# Altium PCB PCB.PcbDoc
Units mm, origin at the board's own origin, x right, y up, seen from the top; angles counter-clockwise.
Board outline 161.87 x 80 mm, 2 copper layers (Top Layer, Bottom Layer), stack 1.531 mm thick; 104 components, 44 nets, 267 pads, 77 vias.
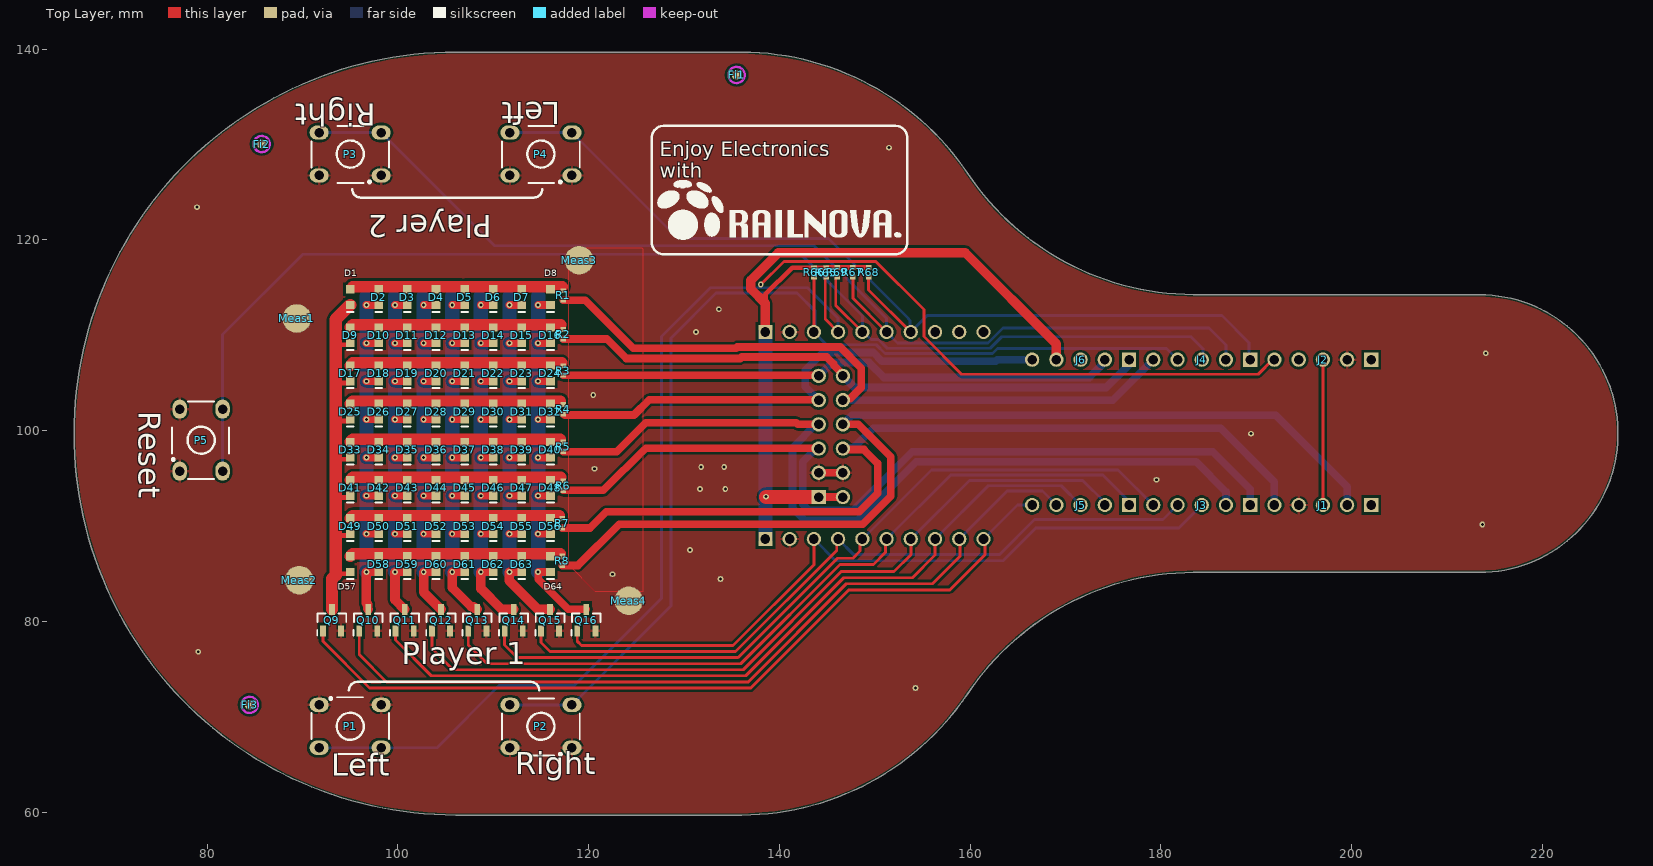
[diagram p0: Top Layer view]
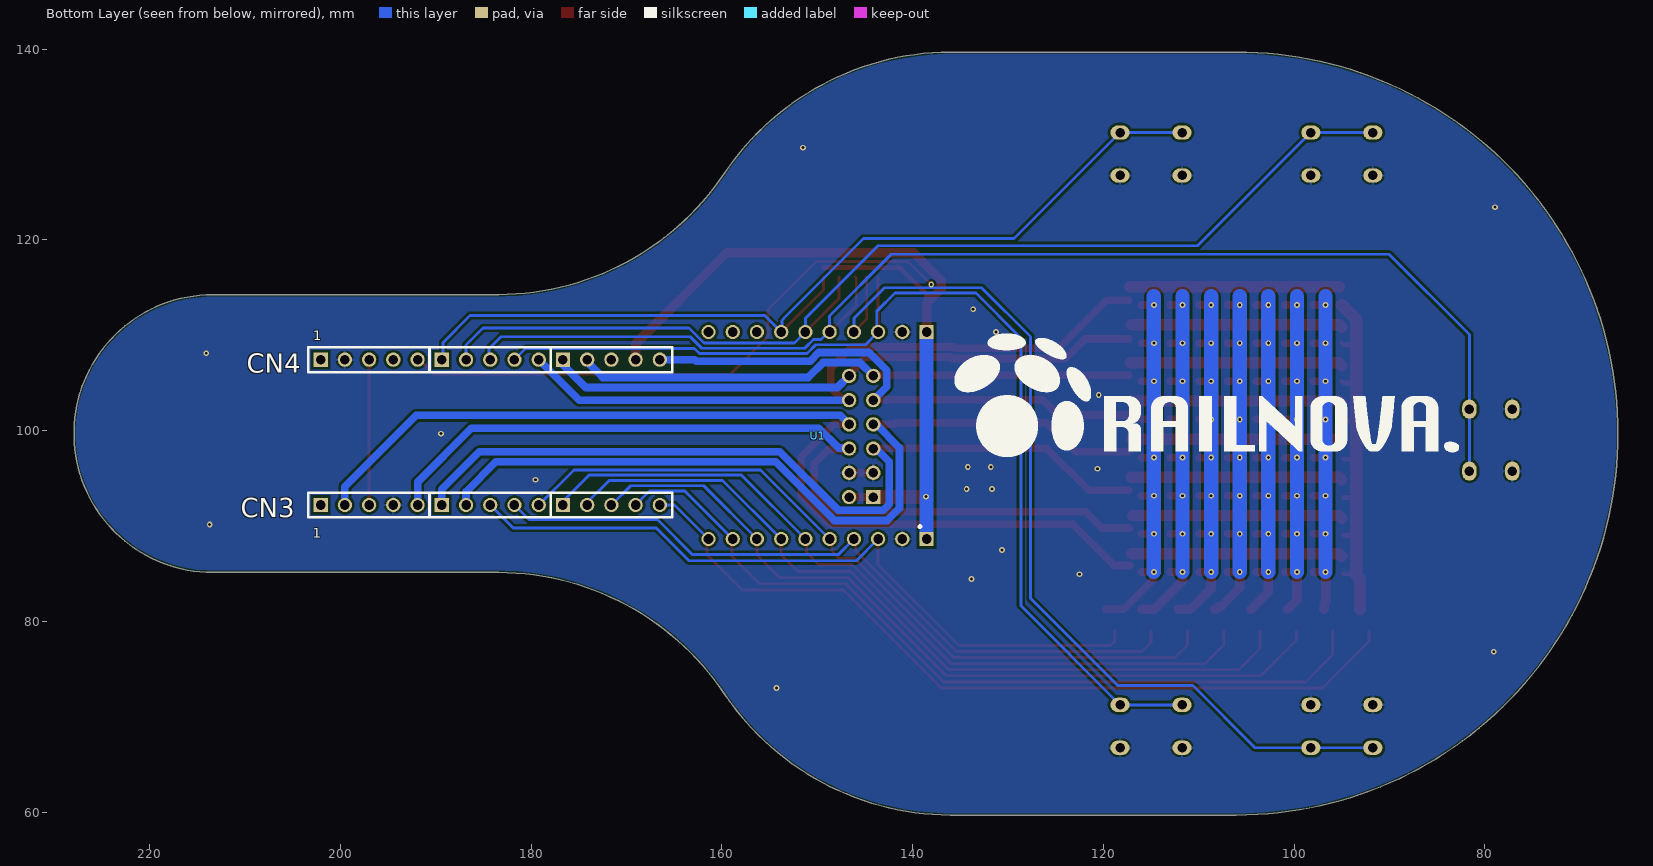
[diagram p1: Bottom Layer view, seen from below]

## Layer stack, top to bottom
Top Solder: solder mask 0.0102, Solder Resist, Dk 3.5
Top Layer: signal copper 0.0356
Dielectric 1: dielectric 1.46, FR-4, Dk 4.8
Bottom Layer: signal copper 0.0356
Bottom Solder: solder mask 0.0102, Solder Resist, Dk 3.5

## Board outline
106.045,59.695 cw(c106.045,99.695) 106.045,139.695 136.045,139.695 cw(c135.89,110.998) 159.729,126.975 ccw(c183.567,142.952) 183.412,114.255 213.412,114.255 cw(c213.36,99.695) 213.412,85.135 183.412,85.135 ccw(c183.567,56.438) 159.729,72.415 cw(c135.89,88.392) 136.045,59.695

## Design rules (kind name [scope] priority, off if disabled: settings)
BoardOutlineClearance [All] p1: gap=0.2 ignorepadtopadclearanceinfootprint=FALSE
Clearance [All] p1: gap=0.254 ignorepadtopadclearanceinfootprint=FALSE except(0: Arc-Hole Track-Hole SMDPad-Hole THPad-Hole Via-Hole Fill-Hole Poly-Hole Region-Hole Text-Hole)
PolygonConnect PolygonConnectDirectOverride [HasFootprint('FOX_measure_point_3mm')] p1: connectstyle=Direct reliefconductorwidth=0.254 reliefentries=4 polygonreliefangle="90 Angle" airgapwidth=0.254
PolygonConnect "PolygonConnect GND" [InNet('GND')] p2: thpad.connectstyle=Relief thpad.reliefconductorwidth=0.3 thpad.reliefentries=4 thpad.polygonreliefangle="90 Angle" thpad.airgapwidth=0.2 smdpad.connectstyle=Relief smdpad.reliefconductorwidth=0.3 smdpad.reliefentries=4 smdpad.polygonreliefangle="90 Angle" smdpad.airgapwidth=0.175 via.connectstyle=Direct via.reliefconductorwidth=0.2 via.reliefentries=4 via.polygonreliefangle="90 Angle" via.airgapwidth=0.2
PolygonConnect Default [All] p3: connectstyle=Direct reliefconductorwidth=0.254 reliefentries=4 polygonreliefangle="90 Angle" airgapwidth=0.254
RoutingVias [All] p1: holewidth=0.711 width=1.27 viastyle="Through Hole" minholewidth=0.3 minwidth=0.6 maxholewidth=0.711 maxwidth=1.27
SolderMaskExpansion [All] p1: expansion=0.102 istentingtop=FALSE
Width [All] p1: maxlimit=10 minlimit=0.254 preferedwidth=0.254 minimp=50.000000 maximp=50.000000 favimp=50.000000
30 further rules are at their usual default settings.

## Classes and differential pairs
component class "Top level": Fi1 Fi2 Fi3 J1 J2 J3 J4 J5 J6 Meas1 Meas2 Meas3 Meas4 P1 P2 P3 P4 P5 R65 R66 R67 R68 R69 U1
component class "U_LED Array": D1 D2 D3 D4 D5 D6 D7 D8 D9 D10 D11 D12 D13 D14 D15 D16 D17 D18 D19 D20 D21 D22 D23 D24 D25 D26 D27 D28 D29 D30 D31 D32 D33 D34 D35 D36 D37 D38 D39 D40 D41 D42 D43 D44 D45 D46 D47 D48 D49 D50 D51 D52 D53 D54 D55 D56 D57 D58 D59 D60 D61 D62 D63 D64 Q9 Q10 Q11 Q12 Q13 Q14 Q15 Q16 R1 R2 R3 R4 R5 R6 R7 R8

## Components (designator, comment, footprint, x,y, rotation, side; value= is the part's Value field where it differs from the comment)
D1 "RED" LED0603-IPC-MD 95,114 r90 top locked
D2 "RED" LED0603-IPC-MD 98,114 r90 top locked
D3 "RED" LED0603-IPC-MD 101,114 r90 top locked
D4 "RED" LED0603-IPC-MD 104,114 r90 top locked
D5 "RED" LED0603-IPC-MD 107,114 r90 top locked
D6 "RED" LED0603-IPC-MD 110,114 r90 top locked
D7 "RED" LED0603-IPC-MD 113,114 r90 top locked
D8 "RED" LED0603-IPC-MD 116,114 r90 top locked
D9 "RED" LED0603-IPC-MD 95,110 r90 top locked
D10 "RED" LED0603-IPC-MD 98,110 r90 top locked
D11 "RED" LED0603-IPC-MD 101,110 r90 top locked
D12 "RED" LED0603-IPC-MD 104,110 r90 top locked
D13 "RED" LED0603-IPC-MD 107,110 r90 top locked
D14 "RED" LED0603-IPC-MD 110,110 r90 top locked
D15 "RED" LED0603-IPC-MD 113,110 r90 top locked
D16 "RED" LED0603-IPC-MD 116,110 r90 top locked
D17 "RED" LED0603-IPC-MD 95,106 r90 top locked
D18 "RED" LED0603-IPC-MD 98,106 r90 top locked
D19 "RED" LED0603-IPC-MD 101,106 r90 top locked
D20 "RED" LED0603-IPC-MD 104,106 r90 top locked
D21 "RED" LED0603-IPC-MD 107,106 r90 top locked
D22 "RED" LED0603-IPC-MD 110,106 r90 top locked
D23 "RED" LED0603-IPC-MD 113,106 r90 top locked
D24 "RED" LED0603-IPC-MD 116,106 r90 top locked
D25 "RED" LED0603-IPC-MD 95,102 r90 top locked
D26 "RED" LED0603-IPC-MD 98,102 r90 top locked
D27 "RED" LED0603-IPC-MD 101,102 r90 top locked
D28 "RED" LED0603-IPC-MD 104,102 r90 top locked
D29 "RED" LED0603-IPC-MD 107,102 r90 top locked
D30 "RED" LED0603-IPC-MD 110,102 r90 top locked
D31 "RED" LED0603-IPC-MD 113,102 r90 top locked
D32 "RED" LED0603-IPC-MD 116,102 r90 top locked
D33 "RED" LED0603-IPC-MD 95,98 r90 top locked
D34 "RED" LED0603-IPC-MD 98,98 r90 top locked
D35 "RED" LED0603-IPC-MD 101,98 r90 top locked
D36 "RED" LED0603-IPC-MD 104,98 r90 top locked
D37 "RED" LED0603-IPC-MD 107,98 r90 top locked
D38 "RED" LED0603-IPC-MD 110,98 r90 top locked
D39 "RED" LED0603-IPC-MD 113,98 r90 top locked
D40 "RED" LED0603-IPC-MD 116,98 r90 top locked
D41 "RED" LED0603-IPC-MD 95,94 r90 top locked
D42 "RED" LED0603-IPC-MD 98,94 r90 top locked
D43 "RED" LED0603-IPC-MD 101,94 r90 top locked
D44 "RED" LED0603-IPC-MD 104,94 r90 top locked
D45 "RED" LED0603-IPC-MD 107,94 r90 top locked
D46 "RED" LED0603-IPC-MD 110,94 r90 top locked
D47 "RED" LED0603-IPC-MD 113,94 r90 top locked
D48 "RED" LED0603-IPC-MD 116,94 r90 top locked
D49 "RED" LED0603-IPC-MD 95,90 r90 top locked
D50 "RED" LED0603-IPC-MD 98,90 r90 top locked
D51 "RED" LED0603-IPC-MD 101,90 r90 top locked
D52 "RED" LED0603-IPC-MD 104,90 r90 top locked
D53 "RED" LED0603-IPC-MD 107,90 r90 top locked
D54 "RED" LED0603-IPC-MD 110,90 r90 top locked
D55 "RED" LED0603-IPC-MD 113,90 r90 top locked
D56 "RED" LED0603-IPC-MD 116,90 r90 top locked
D57 "RED" LED0603-IPC-MD 95,86 r90 top locked
D58 "RED" LED0603-IPC-MD 98,86 r90 top locked
D59 "RED" LED0603-IPC-MD 101,86 r90 top locked
D60 "RED" LED0603-IPC-MD 104,86 r90 top locked
D61 "RED" LED0603-IPC-MD 107,86 r90 top locked
D62 "RED" LED0603-IPC-MD 110,86 r90 top locked
D63 "RED" LED0603-IPC-MD 113,86 r90 top locked
D64 "RED" LED0603-IPC-MD 116,86 r90 top locked
Fi1 "700-0003" Fiducial_1mm 135.509,137.287 r0 top
Fi2 "700-0003" Fiducial_1mm 85.725,130.048 r0 top
Fi3 "700-0003" Fiducial_1mm 84.455,71.247 r0 top
J1 "M20-9990545" CON-HDR-VER-M1X5 196.977,92.202 r180 top
J2 "M20-9990545" CON-HDR-VER-M1X5 196.977,107.442 r180 top
J3 "M20-9990545" CON-HDR-VER-M1X5 184.277,92.202 r180 top
J4 "M20-9990545" CON-HDR-VER-M1X5 184.277,107.442 r180 top
J5 "M20-9990545" CON-HDR-VER-M1X5 171.577,92.202 r180 top
J6 "M20-9990545" CON-HDR-VER-M1X5 171.577,107.442 r180 top
Meas1 "700-0012" FOX_measure_point_3mm 89.408,111.76 r0 top
Meas2 "700-0012" FOX_measure_point_3mm 89.662,84.328 r0 top
Meas3 "700-0012" FOX_measure_point_3mm 118.999,117.856 r0 top
Meas4 "700-0012" FOX_measure_point_3mm 124.206,82.169 r0 top
P1 "TS01-66-73-BK-100-D" TS01-66-70-BK 95,69 r0 top
P2 "TS01-66-73-BK-100-D" TS01-66-70-BK 115,69 r180 top
P3 "TS01-66-73-BK-100-D" TS01-66-70-BK 95,129 r180 top
P4 "TS01-66-73-BK-100-D" TS01-66-70-BK 115,129 r180 top
P5 "TS01-66-73-BK-100-D" TS01-66-70-BK 79.375,99 r90 top
Q9 "PMV37ENEA" SOT-23 93.091,80.137 r90 top value="60V 3.5A"
Q10 "PMV37ENEA" SOT-23 96.901,80.137 r90 top value="60V 3.5A"
Q11 "PMV37ENEA" SOT-23 100.711,80.137 r90 top value="60V 3.5A"
Q12 "PMV37ENEA" SOT-23 104.521,80.137 r90 top value="60V 3.5A"
Q13 "PMV37ENEA" SOT-23 108.331,80.137 r90 top value="60V 3.5A"
Q14 "PMV37ENEA" SOT-23 112.141,80.137 r90 top value="60V 3.5A"
Q15 "PMV37ENEA" SOT-23 115.951,80.137 r90 top value="60V 3.5A"
Q16 "PMV37ENEA" SOT-23 119.761,80.137 r90 top value="60V 3.5A"
R1 "470" R0402-IPC-MD 117.348,114.173 r270 top
R2 "470" R0402-IPC-MD 117.348,110.109 r270 top
R3 "470" R0402-IPC-MD 117.348,106.299 r270 top
R4 "470" R0402-IPC-MD 117.348,102.235 r270 top
R5 "470" R0402-IPC-MD 117.348,98.298 r270 top
R6 "470" R0402-IPC-MD 117.348,94.234 r270 top
R7 "470" R0402-IPC-MD 117.242,90.294 r270 top
R8 "470" R0402-IPC-MD 117.221,86.36 r270 top
R65 "10k" R0402-IPC-MD 144.907,116.578 r90 top
R66 "10k" R0402-IPC-MD 143.637,116.586 r90 top
R67 "10k" R0402-IPC-MD 147.701,116.594 r90 top
R68 "10k" R0402-IPC-MD 149.352,116.594 r90 top
R69 "10k" R0402-IPC-MD 146.05,116.594 r90 top
U1 "ICE40HX1K-STICK-EVN" ICE-stick 145.435,99.538 r0 bottom locked

## Footprints (in the part's own frame and the unit in brackets; to place one, negate y for a bottom-side part, rotate by r counter-clockwise, add the part's x,y. Pads: shape width x height; smd on the part's side, far side on the other; paste and mask are expansions set on the pad)
CON-HDR-VER-M1X5 [mm] "Connector; Header; 5x1 Position; vertical Rev=A"
  rect 1.5x1.5 hole 1: 1(-5.08,0)
  round 1.5 hole 1: 2(-2.54,0) 3(0,0) 4(2.54,0) 5(5.08,0)
  body extent -6.35,-1.27 6.35,1.27, height 8.64
Fiducial_1mm [mm] "Fiducial, 1mm dot Rev=A"
  round 1 smd paste-0.5 mask+0.5: pad(0,0)
  Top Layer keep-out circle w0.254: c0,0 r0.85
FOX_measure_point_3mm [mm] "FOX measuring point 3mm Rev=A"
  round 3 smd: pad(0,0)
ICE-stick [mm] "ICE40 USB stick Module Rev=A"
  rect 1.5x1.5 hole 1: 1(-6.9,-10.8) 11(-6.9,10.9) 21(-1.32,6.5)
  round 1.5 hole 1: 2(-4.36,-10.8) 3(-1.82,-10.8) 4(0.72,-10.8) 5(3.26,-10.8) 6(5.8,-10.8) 7(8.34,-10.8) 8(10.88,-10.8) 9(13.42,-10.8) 10(15.96,-10.8) 12(-4.36,10.9) 13(-1.82,10.9) 14(0.72,10.9) 15(3.26,10.9) 16(5.8,10.9) 17(8.34,10.9) 18(10.88,10.9) 19(13.42,10.9) 20(15.96,10.9) 22(-1.32,3.96) 23(-1.32,1.42) 24(-1.32,-1.12) 25(-1.32,-3.66) 26(-1.32,-6.2) 27(1.22,6.5) 28(1.22,3.96) 29(1.22,1.42) 30(1.22,-1.12) 31(1.22,-3.66) 32(1.22,-6.2)
  silkscreen extent -6.25,9.55 -6.15,9.65, body extent -8.43,-12.52 95.57,12.48, height 4
LED0603-IPC-MD [mm] "LED, 0603 package, as per IPC Medium density Rev=B"
  rect 0.85x0.9 smd: 1(-0.825,0) 2(0.825,0)
  Top Layer pour cut-out: -0.436,0.45 0.423,0.45 0.464,0.409 0.464,-0.393 0.409,-0.448 -0.405,-0.448 -0.405,-0.431 -0.436,-0.399
  silkscreen extent -1.55,-0.35 -1.55,0.35, body extent -0.85,-0.45 0.85,0.45, height 0.45
R0402-IPC-MD [mm] "Chip Resistor, 2-Leads, Body 1.00x0.50mm, IPC Medium Density Rev=B"
  rect 0.5x0.6 smd: 1(-0.5,0) 2(0.5,0)
  Top Layer pour cut-out: -0.254,-0.381 0.254,-0.381 0.254,0.381 -0.254,0.381
  body extent -0.55,-0.3 0.55,0.3, height 0.4
SOT-23 [mm] "SOT-23 Rev=B"
  rect 1.15x0.6 smd: 1(-1.125,0.95) 2(-1.125,-0.95) 3(1.125,0)
  silkscreen extent -1.62,-1.5 0.7,1.54, body extent -1.37,-1.55 1.27,1.45, height 1.08
TS01-66-70-BK [mm] "TS01-66-70-BK Rev=A"
  oval 2x1.5 hole 1: 1(-3.25,2.25) 2(3.25,2.25) 3(-3.25,-2.25) 4(3.25,-2.25)
  silkscreen extent -4.06,-2.92 4.06,3.05, body extent -3.95,-3 3.95,3, height 7.3

## Part data
D1 D2 D3 D4 D5 D6 D7 D8 D9 D10 D11 D12 D13 D14 D15 D16 D17 D18 D19 D20 D21 D22 D23 D24 D25 D26 D27 D28 D29 D30 D31 D32 D33 D34 D35 D36 D37 D38 D39 D40 D41 D42 D43 D44 D45 D46 D47 D48 D49 D50 D51 D52 D53 D54 D55 D56 D57 D58 D59 D60 D61 D62 D63 D64: library part 741-0001, "LED RED 0603 2V 20mA 75mW", Manufacturer=VISHAY, MPN=VLMS1300-GS08, Package=0603, Color=RED, Component Type=LED, ComponentLink1Description=ACM, ComponentLink1URL=https://acm.railnova.io/admin/altium_library/component/99/change/, If=20mA, MSL=3, Part Number=741-0001, Pin Count=2, Pmax=75mW, Rev=A, Revision=C, Revision Date=2021-04-21, Revision Note=ok, Status=Active, Vf=2V
Fi1 Fi2 Fi3: "Fiducial", Component Type=Fiducial, ComponentLink1Description=ACM, ComponentLink1URL=https://acm.railnova.io/admin/altium_library/component/3/change/, MPN=Fiducial, MSL=NA, Package=Fiducial, Part Number=700-0003, Pin Count=1, Rev=A, Revision=A, Revision Date=2020-09-14, Revision Note=Created, Status=Review
J1 J2 J3 J4 J5 J6: library part 790-0065, "CONN REC HDR VERTICAL MALE 1X5 P0.1in", Manufacturer=HARWIN, Package="HDR 2.54mm", Angle=VERTICAL, Cols=5, Component Type=REC, ComponentLink1Description=ACM, ComponentLink1URL=https://acm.railnova.io/admin/altium_library/component/326/change/, Gender=MALE, Imax=3A, MPN=M20-9990545, MSL=1, Part Number=790-0065, Pin Count=5, Pitch=0.1in, Rev=A, Revision=A, Revision Date=2020-09-14, Revision Note=Created, Rows=1, Status=Review, Style=HDR, Vmax=750V
Meas1 Meas2 Meas3 Meas4: "Measuring point for FOX, 3mm without soldermask", MPN=MeasurePoint, Package=3mm, Component Type=Fiducial, ComponentLink1Description=ACM, ComponentLink1URL=https://acm.railnova.io/admin/altium_library/component/448/change/, MSL=NA, Part Number=700-0012, Pin Count=1, Rev=C, Revision=D, Revision Date=2021-12-03, Revision Note="Schematic FOX_measure_point_3mm was updated on EDA-rnlib2 repository.", Status=Review
P1 P2 P3 P4 P5: library part 789-0002, "Push Button 6 x 6 mm, 7 mm Act Height, 100 gf, Black, Short Crimped, Through Hole, SPST", Package=WS-TUS, Resistance=100mOhm, Component Type="Push Button", ComponentLink1Description=ACM, ComponentLink1URL=https://acm.railnova.io/admin/altium_library/component/498/change/, ComponentLink2Description=Datasheet, ComponentLink2URL=https://www.mouser.be/datasheet/2/670/ts01-2586199.pdf, Imax=50mA, MPN=TS01-66-73-BK-100-D, MSL=1, Part Number=789-0002, Pin Count=4, Pmax=0.6W, Rev=A, Revision=B, Revision Date=2022-04-14, Revision Note=ok, Status=Review, Style="Through Hole", Vmax=12V
Q9 Q10 Q11 Q12 Q13 Q14 Q15 Q16: library part 781-0010, "60 V, N-channel Trench MOSFET", Manufacturer=NEXPERIA, Package=SOT-23, Component Type=N-Ch, ComponentLink1Description=ACM, ComponentLink1URL=https://acm.railnova.io/admin/altium_library/component/386/change/, ComponentLink2Description=Datasheet, ComponentLink2URL=https://assets.nexperia.com/documents/data-sheet/PMV37ENEA.pdf, Id Max=3.5, Id Pk=17, MPN=PMV37ENEA, MSL=1, Part Number=781-0010, Pin Count=3, Qg=8.8E-9, Qgd=1.8E-9, Rds On 4.5=0.045, Rds On 10=0.037, Rev=A, Revision=C, Revision Date=2021-04-16, Revision Note="Footprint SOT-23 was updated on EDA-rnlib2 repository.", Status=Review, Vds Max=60, Vgs Th=1.7-2.3
R1 R2 R3 R4 R5 R6 R7 R8: library part 750-0025, "Resistor 470 0402 1% 63.0 mW", Manufacturer=VISHAY, MPN=CRCW0402470RFKED, Package=0402, Tolerance=1%, Component Type="Thick Film", ComponentLink1Description=ACM, ComponentLink1URL=https://acm.railnova.io/admin/altium_library/component/128/change/, MSL=1, Part Number=750-0025, Pin Count=2, Pmax="63.0 mW", Rev=A, Revision=B, Revision Date=2021-03-10, Revision Note="Footprint R0402-IPC-MD was updated on EDA-rnlib2 repository.", Status=Review, Tcoef="100 ppm/C", Vmax="50.0 V"
R65 R66 R67 R68 R69: library part 750-0006, "Resistor 10k 0402 1% 63.0 mW", Manufacturer=VISHAY, MPN=CRCW040210K0FKED, Package=0402, Tolerance=1%, Component Type="Thick Film", ComponentLink1Description=ACM, ComponentLink1URL=https://acm.railnova.io/admin/altium_library/component/109/change/, MSL=1, Part Number=750-0006, Pin Count=2, Pmax="63.0 mW", Rev=A, Revision=C, Revision Date=2021-04-21, Revision Note=OK, Status=Active, Tcoef="100 ppm/C", Vmax="50.0 V"
U1: library part 775-0011, "iCE40 FPGA USB stick", Manufacturer="LATTICE SEMICONDUCTOR", Package=SOM, Component Type=SOM, ComponentLink1Description=ACM, ComponentLink1URL=https://acm.railnova.io/admin/altium_library/component/501/change/, ComponentLink2Description=Datasheet, ComponentLink2URL=https://www.farnell.com/datasheets/1737019.pdf, MPN=ICE40HX1K-STICK-EVN, MSL=NA, Part Description="IEEE 802.11a/b/g/n Wi-Fi, Bluetooth 3.0+HS Module", Part Number=775-0011, Pin Count=32, Rev=A, Revision=A, Revision Date=2022-04-14, Revision Note="Created by Abdellah Azaanoun", Status=Draft

## Via types
v1: diameter 0.6, hole 0.3, Top Layer to Bottom Layer, tented both sides, 77 vias

## Nets (pads, with @x,y where several pads share a name; then routed paths per layer and width w, separated by ;. In a path a pad name is that pad's centre, name@x,y a point inside that pad or via, vN(x,y) a via of type N, cw(c..) or ccw(c..) an arc to the next point about the centre after c; other vN are vias at no path point)
5V: J2.4
AREF: J6.3
GND: J1.4 J2.2 Meas1.pad Meas2.pad Meas3.pad Meas4.pad P1.1 P1.2 P2.1 P2.2 P3.1 P3.2 P4.1 P4.2 P5.1 P5.2 Q9.2 Q10.2 Q11.2 Q12.2 Q13.2 Q14.2 Q15.2 Q16.2 U1.2 U1.12 U1.22 U1.28 | length 2.5
  Top Layer w0.8: U1.22 U1.28
  other v1: 154.259,73.012 79.075,76.822 133.812,84.442 122.509,84.95 130.637,87.49 213.695,90.157 131.668,93.892 134.335,93.892 179.532,94.856 120.604,95.999 131.795,96.178 134.208,96.178 189.438,99.682 120.477,103.746 214.059,108.116 131.258,110.342 133.649,112.733 78.948,123.431 151.498,129.669
LED_L1: J4.5 R1.2 U1.31 | length 73.1
  Top Layer w0.8: R1.2 119.626,113.673 124.676,108.623 135.451,108.623 135.598,108.77 146.373,108.77 148.59,106.553 148.59,104.521 147.401,103.332 146.788,103.332 U1.31
  Bottom Layer w0.8: U1.31 174.953,103.198 J4.5@179.15,107.395
LED_L2: J6.1 R2.2 U1.32 | length 62.7
  Top Layer w0.8: R2.2 121.912,109.609 123.952,107.569 135.888,107.569 136.035,107.716 144.971,107.716 145.705,106.981 145.705,106.877 146.655,105.928 U1.32
  Bottom Layer w0.8: U1.32 147.872,104.521 174.244,104.521 J6.1@176.657,106.934
LED_L3: J6.2 R3.2 U1.26 | length 59
  Top Layer w0.8: R3.2 144.054,105.799 U1.26
  Bottom Layer w0.8: U1.26 145.519,107.142 149.387,107.142 150.955,105.575 172.504,105.575 173.767,106.838 173.767,106.903 174.176,107.312 174.117,107.371 J6.2
LED_L4: J6.5 R4.2 U1.25 | length 56.2
  Top Layer w0.8: R4.2 117.395,101.735 117.49,101.64 124.754,101.64 126.365,103.251 143.988,103.251 cw(c143.988,103.072) U1.25
  Bottom Layer w0.8: U1.25 142.711,104.602 142.711,106.32 144.587,108.196 149.824,108.196 150.748,107.272 162.665,107.272 162.834,107.442 J6.5
LED_L5: J3.2 R5.2 U1.24 | length 89.4
  Top Layer w0.8: R5.2 122.944,97.798 125.984,100.838 141.765,100.838 141.944,100.658 U1.24
  Bottom Layer w0.8: U1.24 143.816,100.658 141.377,98.219 141.377,91.86 142.657,90.58 148.205,90.58 154.361,96.736 183.68,96.736 186.817,93.599 J3.2
LED_L6: J3.1 R6.2 U1.23 | length 88.3
  Top Layer w0.8: R6.2 121.547,93.734 125.984,98.171 143.988,98.171 cw(c143.988,97.992) U1.23
  Bottom Layer w0.8: U1.23 143.816,98.118 142.431,96.733 142.431,92.297 143.094,91.634 147.768,91.634 153.924,97.79 185.42,97.79 189.357,93.853 J3.1
LED_L7: J1.5 R7.2 U1.29 | length 92.9
  Top Layer w0.8: R7.2 120.147,89.794 121.839,91.486 148.38,91.486 150.328,93.434 150.328,96.552 148.863,98.016 146.757,98.016 U1.29
  Bottom Layer w0.8: U1.29 146.715,98.179 147.752,98.179 149.835,100.261 186.251,100.261 191.897,94.615 J1.5
LED_L8: J1.2 R8.2 U1.30 | length 106.3
  Top Layer w0.8: R8.2 118.88,85.86 123.19,90.17 148.717,90.17 151.676,93.129 151.676,97.244 148.262,100.658 U1.30
  Bottom Layer w0.8: U1.30 147.596,101.6 192.024,101.6 199.517,94.107 J1.2
LED_R1: J5.5 Q9.1 U1.20 | length 86.5
  Top Layer w0.3: Q9.1 92.141,77.912 97.028,73.025 136.991,73.025 147.273,83.307 157.856,83.307 161.544,86.995 U1.20@161.544,88.553
  Bottom Layer w0.3: U1.20 164.958,92.202 J5.5
LED_R2: J5.4 Q10.1 U1.19 | length 86.8
  Top Layer w0.3: Q10.1 95.951,76.515 98.806,73.66 136.727,73.66 147.01,83.942 156.051,83.942 158.935,86.827 158.935,88.558 U1.19
  Bottom Layer w0.3: U1.19 163.885,93.669 167.57,93.669 J5.4
LED_R3: J5.3 Q11.1 U1.18 | length 84.4
  Top Layer w0.3: Q11.1 99.761,78.039 103.505,74.295 136.464,74.295 146.747,84.577 153.949,84.577 156.319,86.947 156.319,88.634 U1.18
  Bottom Layer w0.3: U1.18 161.899,94.223 169.556,94.223 J5.3
LED_R4: J5.2 Q12.1 U1.17 | length 83.5
  Top Layer w0.3: Q12.1 103.571,77.15 105.791,74.93 136.201,74.93 146.488,85.217 152.019,85.217 153.797,86.995 153.797,88.616 U1.17
  Bottom Layer w0.3: U1.17 159.913,94.777 171.796,94.777 J5.2@174.117,92.456
LED_R5: J5.1 Q13.1 U1.16 | length 81.8
  Top Layer w0.3: Q13.1 107.381,77.531 109.347,75.565 135.938,75.565 146.352,85.979 149.86,85.979 151.13,87.249 151.13,88.534 U1.16
  Bottom Layer w0.3: U1.16 157.927,95.331 173.909,95.331 J5.1@176.784,92.456
LED_R6: J3.5 Q14.1 U1.15 | length 80.3
  Top Layer w0.3: Q14.1 111.191,77.531 112.522,76.2 135.675,76.2 146.089,86.614 147.701,86.614 148.463,87.376 148.463,87.863 148.465,87.865 148.465,88.409 U1.15
  Bottom Layer w0.3: U1.15 155.941,95.885 175.514,95.885 J3.5
LED_R7: J3.4 Q15.1 U1.14 | length 76.7
  Top Layer w0.3: Q15.1 115.001,77.785 115.951,76.835 135.412,76.835 146.016,87.438 146.016,88.5 U1.14
  Bottom Layer w0.3: U1.14 147.798,86.995 163.068,86.995 166.751,90.678 180.213,90.678 J3.4
LED_R8: J3.3 Q16.1 U1.13 | length 76.3
  Top Layer w0.3: Q16.1 118.811,77.912 119.253,77.47 135.149,77.47 143.615,85.935 U1.13
  Bottom Layer w0.3: U1.13 145.893,86.36 163.449,86.36 166.878,89.789 181.864,89.789 J3.3
NetD1_1: D1.1 D9.1 D17.1 D25.1 D33.1 D41.1 D49.1 D57.1 Q9.3 | length 40.6
  Top Layer w0.5: 93.8,85 D57.1@94.825,85 ; 93.8,89 D49.1@94.825,89 ; 93.8,93 D41.1@94.825,93 ; 93.8,97 D33.1@94.825,97 ; 93.8,101 94.825,101 D25.1 ; 93.8,105 94.825,105 D17.1 ; 93.8,109 94.825,109 D9.1
  Top Layer w1.3: Q9.3 93.091,84.455 93.472,84.836 93.472,111.647 D1.1
NetD1_2: D1.2 D2.2 D3.2 D4.2 D5.2 D6.2 D7.2 D8.2 R1.1 | length 21.7
  Top Layer w1.2: D1.2@95.279,115.104 98,115.104 101,115.104 104,115.104 D5.2@106.721,115.104 ; D5.2@107,115.104 110,115.104 113,115.104 116,115.104 117.254,115.104
NetD2_1: D2.1 D10.1 D18.1 D26.1 D34.1 D42.1 D50.1 D58.1 Q10.3 | length 43.3
  Top Layer w0.8: v1(96.699,85.175) D58.1 ; v1(96.699,89.175) D50.1 ; v1(96.699,93.175) D42.1 ; v1(96.699,97.175) D34.1 ; v1(96.699,101.175) D26.1 ; v1(96.699,105.175) D18.1 ; v1(96.699,109.175) D10.1 ; v1(96.699,113.175) D2.1
  Top Layer w1: v1(96.699,85.175) 96.699,81.915 96.826,81.788 96.826,81.337 Q10.3
  Bottom Layer w1.5: v1@96.701,85.175 96.701,102.079 96.701,114.079
NetD3_1: D3.1 D11.1 D19.1 D27.1 D35.1 D43.1 D51.1 D59.1 Q11.3 | length 43.6
  Top Layer w0.8: v1(99.699,85.175) D59.1 ; v1(99.699,89.175) D51.1 ; v1(99.699,93.175) D43.1 ; v1(99.699,97.175) D35.1 ; v1(99.699,101.175) D27.1 ; v1(99.699,105.175) D19.1 ; v1(99.699,109.175) D11.1 ; v1(99.699,113.175) D3.1
  Top Layer w1: v1(99.699,85.175) 99.699,82.274 Q11.3
  Bottom Layer w1.5: v1@99.701,85.175 99.701,102.079 99.701,114.079
NetD4_1: D4.1 D12.1 D20.1 D28.1 D36.1 D44.1 D52.1 D60.1 Q12.3 | length 44
  Top Layer w0.8: v1(102.699,85.175) D60.1 ; v1(102.699,89.175) D52.1 ; v1(102.699,93.175) D44.1 ; v1(102.699,97.175) D36.1 ; v1(102.699,101.175) D28.1 ; v1(102.699,105.175) D20.1 ; v1(102.699,109.175) D12.1 ; v1(102.699,113.175) D4.1
  Top Layer w1: v1(102.699,85.175) 102.699,83.084 Q12.3
  Bottom Layer w1.5: v1@102.701,85.175 102.701,102.079 102.701,114.079
NetD5_1: D5.1 D13.1 D21.1 D29.1 D37.1 D45.1 D53.1 D61.1 Q13.3 | length 44.5
  Top Layer w0.8: v1(105.699,85.175) D61.1 ; v1(105.699,89.175) D53.1 ; v1(105.699,93.175) D45.1 ; v1(105.699,97.175) D37.1 ; v1(105.699,101.175) D29.1 ; v1(105.699,105.175) D21.1 ; v1(105.699,109.175) D13.1 ; v1(105.699,113.175) D5.1
  Top Layer w1: v1(105.699,85.175) 105.699,83.531 107.693,81.537 107.931,81.537 108.206,81.262 Q13.3
  Bottom Layer w1.5: v1@105.701,85.175 105.701,114.079
NetD6_1: D6.1 D14.1 D22.1 D30.1 D38.1 D46.1 D54.1 D62.1 Q14.3 | length 45.4
  Top Layer w0.8: v1(108.699,85.175) D62.1 ; v1(108.699,89.175) D54.1 ; v1(108.699,93.175) D46.1 ; v1(108.699,97.175) D38.1 ; v1(108.699,101.175) D30.1 ; v1(108.699,105.175) D22.1 ; v1(108.699,109.175) D14.1 ; v1(108.699,113.175) D6.1
  Top Layer w1: v1(108.699,85.175) 108.712,85.162 108.712,83.439 110.875,81.276 112.127,81.276 Q14.3
  Bottom Layer w1.5: v1@108.701,85.175 108.701,114.079
NetD7_1: D7.1 D15.1 D23.1 D31.1 D39.1 D47.1 D55.1 D63.1 Q15.3 | length 45.8
  Top Layer w0.8: v1(111.699,85.175) D63.1 ; v1(111.699,89.175) D55.1 ; v1(111.699,93.175) D47.1 ; v1(111.699,97.175) D39.1 ; v1(111.699,101.175) D31.1 ; v1(111.699,105.175) D23.1 ; v1(111.699,109.175) D15.1 ; v1(111.699,113.175) D7.1
  Top Layer w1: v1(111.699,85.175) 111.663,85.139 111.663,84.276 114.674,81.265 115.948,81.265 Q15.3
  Bottom Layer w1.5: v1@111.701,85.175 111.701,102.079 111.701,114.079
NetD8_1: D8.1 D16.1 D24.1 D32.1 D40.1 D48.1 D56.1 D64.1 Q16.3 | length 46.4
  Top Layer w0.8: v1(114.699,89.175) D56.1 ; v1(114.699,93.175) D48.1 ; v1(114.699,97.175) D40.1 ; v1(114.699,101.175) D32.1 ; v1(114.699,105.175) D24.1 ; v1(114.699,109.175) D16.1 ; v1(114.699,113.175) D8.1 ; D64.1 v1(114.699,85.175) 114.699,84.415 117.852,81.262 Q16.3
  Bottom Layer w1.5: v1@114.701,85.175 114.701,114.079
NetD9_2: D9.2 D10.2 D11.2 D12.2 D13.2 D14.2 D15.2 D16.2 R2.1 | length 22.2
  Top Layer w1.2: D9.2 95.279,111.104 98,111.104 101,111.104 104,111.104 107,111.104 110,111.104 113,111.104 116,111.104 117.097,111.104
NetD17_2: D17.2 D18.2 D19.2 D20.2 D21.2 D22.2 D23.2 D24.2 R3.1 | length 22.3
  Top Layer w1.2: D17.2 95.279,107.104 98,107.104 101,107.104 104,107.104 107,107.104 110,107.104 113,107.104 116,107.104 117.169,107.104
NetD25_2: D25.2 D26.2 D27.2 D28.2 D29.2 D30.2 D31.2 D32.2 R4.1 | length 22.2
  Top Layer w1.2: D25.2 95.279,103.104 98,103.104 101,103.104 104,103.104 107,103.104 110,103.104 113,103.104 116,103.104 117.036,103.104
NetD33_2: D33.2 D34.2 D35.2 D36.2 D37.2 D38.2 D39.2 D40.2 R5.1 | length 22.1
  Top Layer w1.2: D33.2 95.279,99.104 98,99.104 101,99.104 104,99.104 107,99.104 110,99.104 113,99.104 116,99.104 117.012,99.104
NetD41_2: D41.2 D42.2 D43.2 D44.2 D45.2 D46.2 D47.2 D48.2 R6.1 | length 22.2
  Top Layer w1.2: D41.2 95.279,95.104 98,95.104 101,95.104 104,95.104 107,95.104 110,95.104 113,95.104 116,95.104 117.061,95.104
NetD49_2: D49.2 D50.2 D51.2 D52.2 D53.2 D54.2 D55.2 D56.2 R7.1 | length 22
  Top Layer w1.2: D49.2 95.279,91.104 98,91.104 101,91.104 104,91.104 107,91.104 110,91.104 113,91.104 116,91.104 116.903,91.104
NetD57_2: D57.2 D58.2 D59.2 D60.2 D61.2 D62.2 D63.2 D64.2 R8.1 | length 22.2
  Top Layer w1.2: D57.2 95.279,87.104 107,87.104 113,87.104 R8.1@117.036,87.104
NRST: J1.3 J2.3 | length 15.2
  Top Layer w0.3: J1.3 J2.3
sw1: J2.5 P1.3 P1.4 R65.1 U1.4 | length 161.6
  Top Layer w0.3: v1(138.049,115.316) 140.481,117.748 150.095,117.748 155.161,112.682 155.161,109.86 159.103,105.918 190.205,105.918 191.729,107.442 J2.5 ; R65.1 144.903,116.078 144.803,115.978 144.803,111.69 U1.4
  Bottom Layer w0.3: P1.3 P1.4 104.088,66.75 110.617,73.279 118.491,73.279 127.635,82.423 127.635,109.855 132.761,114.981 142.956,114.981 146.155,111.782 U1.4
sw2: J4.4 P2.3 P2.4 R66.1 U1.3 | length 114.9
  Top Layer w0.3: U1.3 143.637,110.361 R66.1
  Bottom Layer w0.3: P2.4 P2.3 128.651,81.651 128.651,109.728 133.35,114.427 141.859,114.427 143.764,112.522 143.764,110.488 U1.3 144.953,109 150.157,109 151.081,108.076 162.331,108.076 162.851,108.596 180.583,108.596 J4.4
sw3: J4.2 P3.3 P3.4 R67.1 U1.6 | length 114.8
  Top Layer w0.3: R67.1 147.701,113.872 U1.6
  Bottom Layer w0.3: P3.4 P3.3 110.12,119.38 143.637,119.38 151.235,111.782 U1.6 152.389,109.184 161.873,109.184 163.443,110.755 185.028,110.755 186.817,108.966 J4.2@186.817,107.823
sw4: J4.1 P4.3 P4.4 R68.1 U1.7 | length 98.2
  Top Layer w0.3: R68.1 149.352,114.761 U1.7
  Bottom Layer w0.3: P4.4 P4.3 129.358,120.142 145.161,120.142 153.543,111.76 153.543,111.688 153.693,111.538 153.693,110.42 U1.7 155.502,112.066 186.384,112.066 189.23,109.22 189.23,107.696 189.357,107.569 J4.1
sw5: J4.3 P5.3 P5.4 R69.1 U1.5 | length 134.6
  Top Layer w0.3: R69.1 146,116.094 145.9,115.994 145.9,113.133 U1.5
  Bottom Layer w0.3: P5.3 P5.4 81.625,110.073 90.043,118.491 142.24,118.491 148.718,112.013 148.718,110.362 U1.5 148.824,110.338 149.608,109.554 150.387,109.554 151.311,108.63 162.102,108.63 163.307,109.836 183.153,109.836 184.404,108.585 J4.3@184.404,107.696
Tx: J1.1
VCC: J6.4 R65.2 R66.2 R67.2 R68.2 R69.2 U1.1 U1.11 U1.21 U1.27 | length 87.6
  Top Layer w0.5: 138.535,113.34 138.535,114.278 141.343,117.086 144.849,117.086 144.857,117.078 144.957,117.078 144.973,117.094 R69.2 R67.2 R68.2
  Top Layer w0.8: U1.21 U1.27
  Top Layer w1: U1.1 138.535,113.34 136.995,114.879 136.995,115.753 139.894,118.652 159.478,118.652 169.037,109.093 J6.4
  Top Layer w1.5: v1@138.631,93.038 U1.21
  Bottom Layer w1.5: U1.11 138.535,93.077 U1.1
  other v1: 138.6,93.077
VIN: J2.1
pads on no net: Fi1.pad Fi2.pad Fi3.pad U1.8 U1.9 U1.10

## Polygon pours and split planes (outlines as drawn)
GND on Top Layer "GND_L01_P006" (solid, remove dead copper, pour order 6): 102.852,140.339 cw(c103.465,139.726) 103.465,140.593 153.235,140.593 cw(c153.235,138.053) 155.031,139.849 178.308,116.572 ccw(c180.104,118.368) 180.104,115.828 219.529,115.828 cw(c219.529,113.288) 221.325,115.084 228.981,107.428 cw(c227.185,105.632) 229.725,105.632 229.725,94.147 cw(c227.185,94.147) 228.981,92.351 221.071,84.441 cw(c219.275,86.237) 219.275,83.697 177.437,83.697 ccw(c177.437,81.157) 175.641,82.953 152.491,59.803 cw(c150.695,61.599) 150.695,59.059 88.41,59.059 cw(c88.41,61.599) 86.614,59.803 65.623,80.794 cw(c67.419,82.59) 64.879,82.59 64.879,115.919 cw(c67.419,115.919) 65.623,117.715 87.757,139.849 cw(c89.553,138.053) 89.553,140.593 103.36,140.593
VCC on Top Layer "VCC_L01_P000" (solid, remove dead copper, pour order 0): 119.761,119.126 117.856,117.221 117.856,85.979 120.65,83.185 125.73,83.185 125.73,118.999 125.603,119.126
GND on Bottom Layer "GND_L02_P005" (solid, remove dead copper, pour order 5): 102.87,140.208 cw(c103.483,139.595) 103.483,140.462 153.253,140.462 cw(c153.253,137.922) 155.049,139.718 178.326,116.441 ccw(c180.122,118.237) 180.122,115.697 219.547,115.697 cw(c219.547,113.157) 221.343,114.953 228.999,107.297 cw(c227.203,105.501) 229.743,105.501 229.743,94.016 cw(c227.203,94.016) 228.999,92.22 221.089,84.31 cw(c219.293,86.106) 219.293,83.566 177.455,83.566 ccw(c177.455,81.026) 175.659,82.822 152.509,59.672 cw(c150.713,61.468) 150.713,58.928 88.428,58.928 cw(c88.428,61.468) 86.632,59.672 65.641,80.663 cw(c67.437,82.459) 64.897,82.459 64.897,115.788 cw(c67.437,115.788) 65.641,117.584 87.775,139.718 cw(c89.571,137.922) 89.571,140.462 103.378,140.462

## Silkscreen, mask and mechanical layers (free items; w line width, h text height)
Top Overlay:
  drawing of 30 lines, arcs and shapes, not listed
  text "Left" at 117.001,135.228 h4 r180
  text "Right" at 97.694,135.075 h4 r180
  text "Enjoy Electronics  / with" at 127.476,126.492 h1.52
  text "Player 2" at 109.82,123.352 h4 r180
  text "Reset" at 72.045,102.034 h4 r270
  text "Player 1" at 100.427,74.745 h4
  text "Right" at 112.297,63.169 h4
  text "Left" at 92.991,63.016 h4
Bottom Overlay:
  drawing of 16 lines, arcs and shapes, not listed
  text "1" at 202.819,109.474 h1
  text "CN4" at 209.804,106.045 h2
  text "CN3" at 210.439,90.932 h2
  text "1" at 202.896,88.784 h1
Mechanical 1:
  the board outline again, w0.254